# Altium PCB Amplifier.PcbDoc
Units mm, origin at the board's own origin, x right, y up, seen from the top; angles counter-clockwise.
Board outline 40 x 100 mm, 4 copper layers (Top Layer, Gnd, DC Power, Bottom Layer), stack 1.782 mm thick; 67 components, 37 nets, 183 pads, 2 vias.
Unrouted connection lines stored in the file: 106.
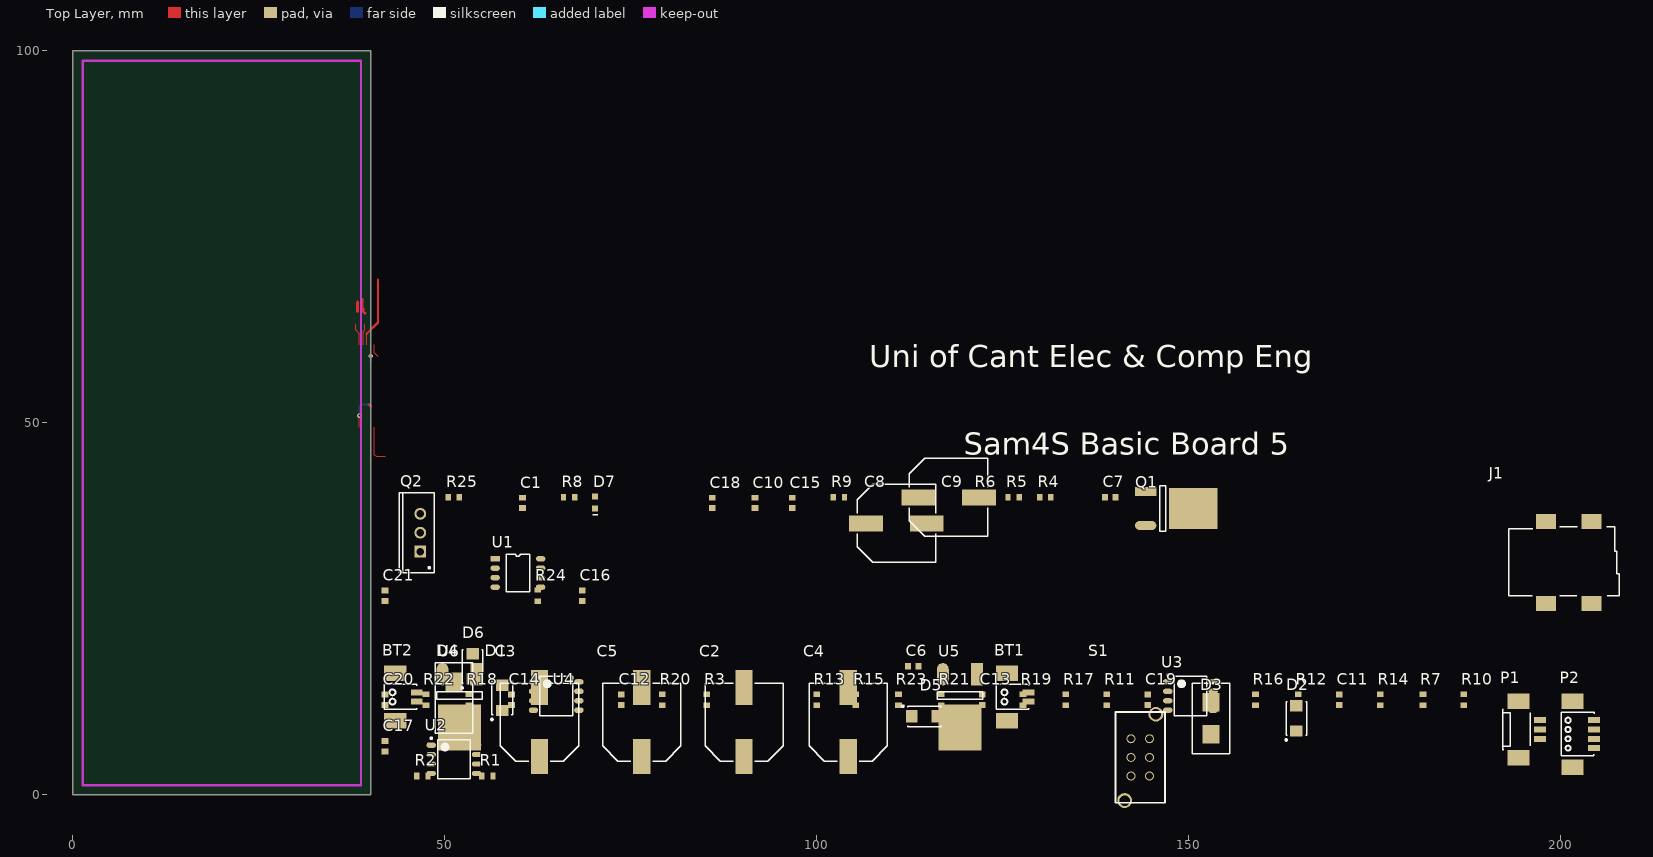
[diagram p0: Top Layer view]
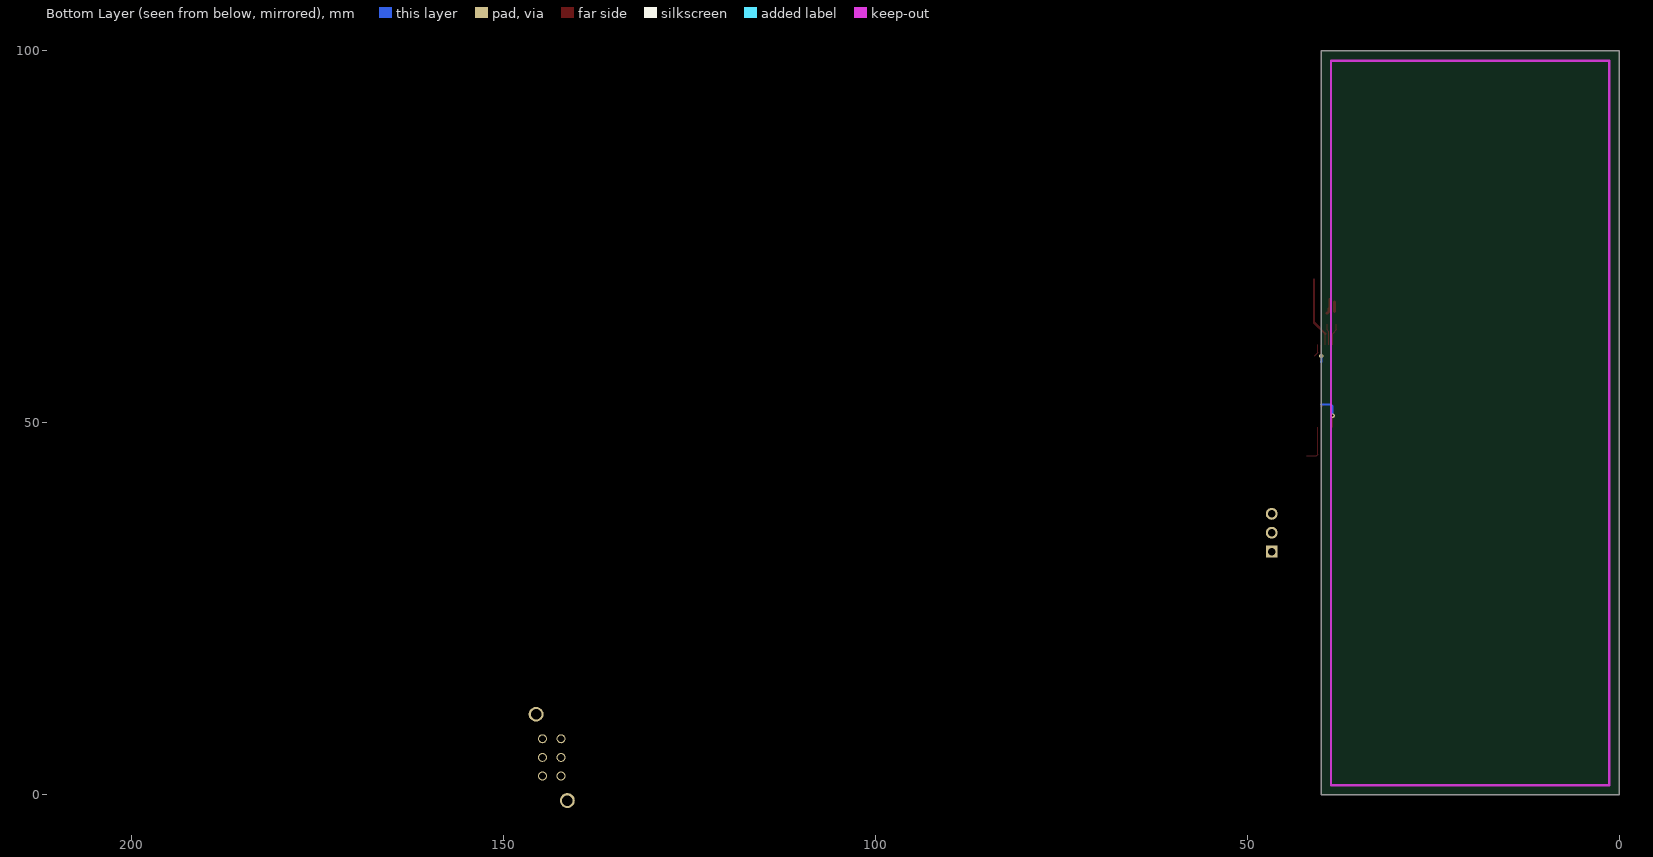
[diagram p1: Bottom Layer view, seen from below]
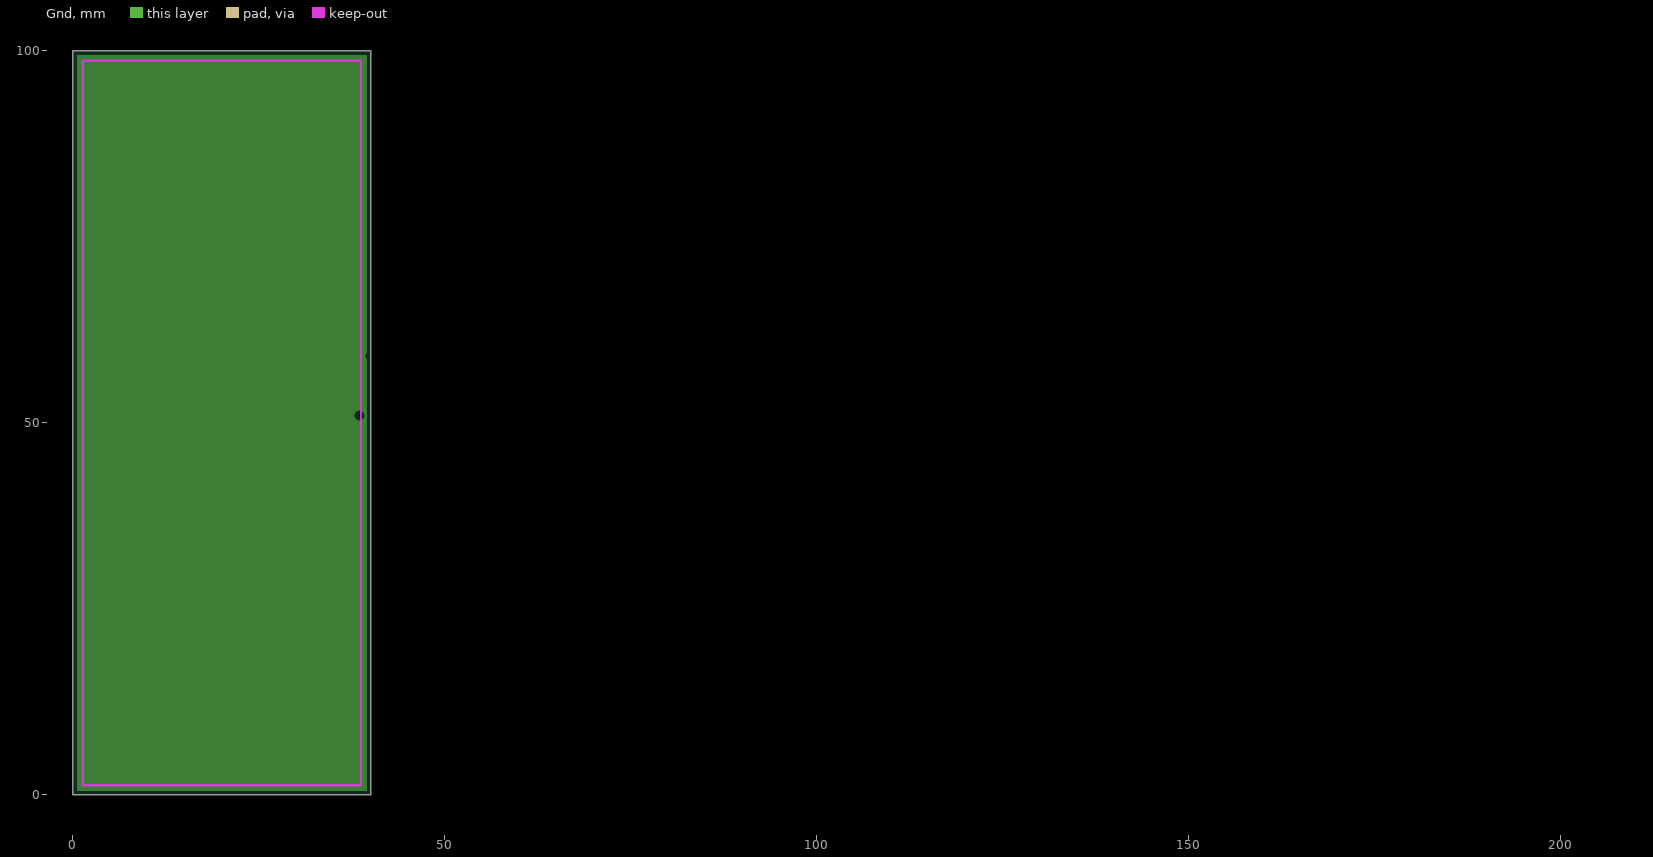
[diagram p2: Gnd, clearances drawn from the general rule]
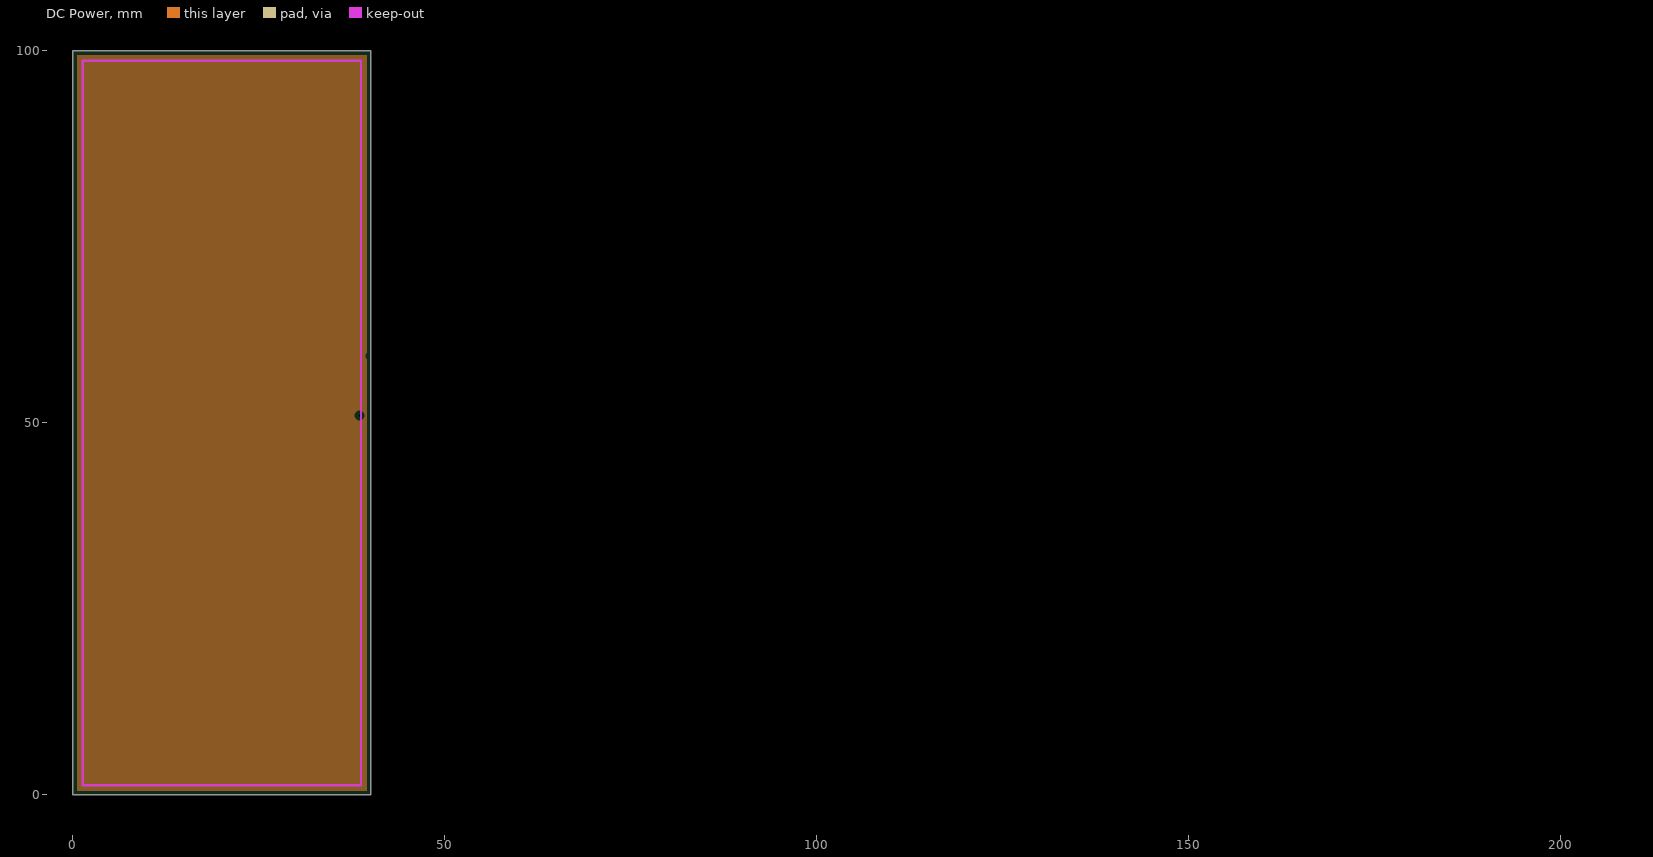
[diagram p3: DC Power, clearances drawn from the general rule]

## Layer stack, top to bottom
Top Solder: solder mask 0.0102, Solder Resist, Dk 3.5
Top Layer: signal copper 0.0356
Dielectric1: prepreg 0.32, FR-4, Dk 4.8
Gnd: plane copper 0.0356
Dielectric2: core 1, FR-4, Dk 4.8
DC Power: plane copper 0.0356
Dielectric3: prepreg 0.32, FR-4, Dk 4.8
Bottom Layer: signal copper 0.0356
Bottom Solder: solder mask 0.0102, Solder Resist, Dk 3.5

## Board outline
0,0 0,100 40,100 40,0

## Design rules (kind name [scope] priority, off if disabled: settings)
Clearance Min_Clearance_Circuit_Labs [All] p1: gap=0.15
FanoutControl Fanout_BGA [IsBGA] p1 off: bgadir=Out bgaviamode=Centered fanoutstyle=Auto fanoutdirection=Alternating viagrid=0.025 // Fanout_BGA (Default Rule)
HoleSize [All] p1: absolutevalues=TRUE maxlimit=10 minlimit=0.3 maxpercent=80.000 minpercent=20.000
MinimumAnnularRing [All] p1: minimumring=0.1
MinimumSolderMaskSliver [All] p1 off: minsoldermaskwidth=0.25
NetAntennae [All] p1: netantennaetolerance=1
PasteMaskExpansion [All] p1 off: expansion=0.2
PlaneClearance [All] p1: clearance=0.508
PlaneConnect [All] p1: planeconnectstyle=Relief reliefexpansion=0.508 reliefentries=4 reliefconductorwidth=0.254 reliefairgap=0.254
PolygonConnect [All] p1: connectstyle=Relief reliefconductorwidth=0.254 reliefentries=4 polygonreliefangle="90 Angle" airgapwidth=0.254
RoomDefinition "Power Management" [InComponentClass('Power Management')] p1: confinementstyle=ConfineIn formatcopy=TRUE lockcomponents=FALSE outline 41.2,25.3 72.45,25.3 72.45,30.8 41.2,30.8
RoomDefinition Main [InComponentClass('Main')] p2: confinementstyle=ConfineIn formatcopy=TRUE lockcomponents=FALSE outline -50.8,-76.2 0,-76.2 0,-50.8 -50.8,-50.8
RoomDefinition "AC Power Supply" [InComponentClass('AC Power Supply')] p3: confinementstyle=ConfineIn formatcopy=TRUE lockcomponents=FALSE outline 40.95,1.55 129.95,1.55 129.95,20.8 40.95,20.8
RoutingVias [All] p1: holewidth=0.5 width=1 viastyle="Through Hole" minholewidth=0.3 minwidth=0.6 maxholewidth=1 maxwidth=2
SMDNeckDown [All] p1 off: percent=50.000
SMDToCorner [All] p1: distance=98425
SMDToPlane [All] p1: distance=1968504
SilkToSolderMaskClearance SilkscreenOverComponentPads [IsPad] p1: minsilkscreentomaskgap=0.254 clearancetoexposedcopper=TRUE
SolderMaskExpansion [All] p1: expansion=0.102
ViasUnderSMD [All] p1: allowed=FALSE
Width [All] p1: maxlimit=2 minlimit=0.15 preferedwidth=0.3
22 further rules are at their usual default settings.

## Classes and differential pairs
component class "AC Power Supply": BT1 BT2 C2 C3 C4 C5 C6 C7 D1 D2 D3 D4 D5 D6 J1 R1 R2 S1 U5 U6
component class "Power Management": C1 C8 C9 C10 C15 C16 C18 C21 D7 Q1 Q2 R4 R5 R6 R8 R9 R24 R25 U U1
component class Main: C11 C12 C13 C14 C19 C20 J2 J3 P1 P2 R3 R7 R10 R11 R12 R13 R14 R15 R16 R17 R18 R19 R20 R21 R22 R23 S2 U1 U3 U4 VR3

## Components (designator, comment, footprint, x,y, rotation, side; value= is the part's Value field where it differs from the comment)
BT1 "SMD Vert 1.25mm" SD-53398-0219 128.45,13.8 r90 top
BT2 "SMD Vert 1.25mm" SD-53398-0219 46.2,13.8 r90 top
C1 "1uF" CAPC1608L 60.43,39.25 r90 top
C2 "470uF/35V" EEE-FK1V471SP 90.2,9.8 r90 top
C3 "470uF/35V" EEE-FK1V471SP 62.7,9.8 r90 top
C4 "470uF/35V" EEE-FK1V471SP 104.2,9.8 r90 top
C5 "470uF/35V" EEE-FK1V471SP 76.45,9.8 r90 top
C6 "220nF" CAPC1608L 112.95,17.3 r0 top
C7 "220nF" CAPC1608L 139.43,40 r0 top
C8 "220uF/25V" UUQ1E221MCL1GS 110.68,36.5 r0 top
C9 "220uF/25V" UUQ1E221MCL1GS 117.68,40 r0 top
C10 "220nF" CAPC1608L 91.68,39.25 r90 top
C11 "220pF" CAPC1608L 170.2,12.8 r90 top
C12 "220pF" CAPC1608L 73.7,12.8 r90 top
C13 "2.2uF" CAPC1608L 122.2,12.8 r90 top
C14 "2.2uF" CAPC1608L 58.95,12.8 r90 top
C15 "220nF" CAPC1608L 96.68,39.25 r90 top
C16 "220nF" CAPC1608L 68.45,26.8 r90 top
C17 "220nF" CAPC1608L 41.95,6.55 r90 top
C18 "220nF" CAPC1608L 85.93,39.25 r90 top
C19 "220pF" CAPC1608L 144.45,12.8 r90 top
C20 "220pF" CAPC1608L 41.95,12.8 r90 top
C21 "220nF" CAPC1608L 41.95,26.8 r90 top
D1 "SS14-E3/5AT" DIOM4227X23N 57.7,13.05 r90 top
D2 "SS14-E3/5AT" DIOM4227X23N 164.45,10.3 r90 top
D3 "S1BB-13-F" S1BB-13-F 152.95,10.3 r90 top
D4 "S1BB-13-F" S1BB-13-F 51.2,13.05 r90 top
D5 "SS14-E3/5AT" DIOM4227X23N 114.45,10.55 r0 top
D6 "SS14-E3/5AT" DIOM4227X23N 53.7,17.3 r90 top
D7 "H-E RED" WL-SMCW0603 70.18,38.5 r90 top
J1 "Power Skt" 1613_14 198,31.25 r0 top
P1 "SMD Horiz 1.25mm" SD-53261-0319 197.2,10.05 r90 top
P2 "SMD Vert 1.25mm" SD-53398-0419 204.449,10.05 r90 top
Q1 "FQD17P06TM" FQU17P06 144.18,38.5 r0 top
Q2 "FQD10N20CTM" TO-220AB 46.68,35.25 r90 top
R1 "220R" RESC1608L 55.7,2.55 r0 top
R2 "220R" RESC1608L 46.95,2.55 r0 top
R3 "0R" RESC1608L 85.2,12.8 r90 top
R4 "270K" RESC1608L 130.68,40 r0 top
R5 "270K" RESC1608L 126.43,40 r0 top
R6 "40.2K" RESC1608L 122.18,40 r0 top
R7 "0R" RESC1608L 181.45,12.8 r90 top
R8 "270K" RESC1608L 66.68,40 r0 top
R9 "33K" RESC1608L 102.93,40 r0 top
R10 "0R" RESC1608L 186.95,12.8 r90 top
R11 "0R" RESC1608L 138.95,12.8 r90 top
R12 "40.2K" RESC1608L 164.7,12.8 r90 top
R13 "40.2K" RESC1608L 99.95,12.8 r90 top
R14 "10K" RESC1608L 175.7,12.8 r90 top
R15 "0R" RESC1608L 105.2,12.8 r90 top
R16 "1K5" RESC1608L 158.95,12.8 r90 top
R17 "0R" RESC1608L 133.45,12.8 r90 top
R18 "0R" RESC1608L 53.2,12.8 r90 top
R19 "0R" RESC1608L 127.7,12.8 r90 top
R20 "10K" RESC1608L 79.2,12.8 r90 top
R21 "0R" RESC1608L 116.7,12.8 r90 top
R22 "1K5" RESC1608L 47.45,12.8 r90 top
R23 "0R" RESC1608L 110.95,12.8 r90 top
R24 "270K" RESC1608L 62.45,26.8 r90 top
R25 "1M5" RESC1608L 51.18,40 r0 top
S1 "PN22SJSA03QE" "PN22SJSA03QE - duplicate" 143.45,5.05 r90 top
U1 "NJM2903M" NJM2903M#1 56.75,31.75 r0 top
U2 "NJM2903M" NJM2903M#2 51.2,4.8 r0 top
U3 "NJM4556AM" NJM2903M#2 150.2,13.3 r0 top
U4 "NJM4556AM" NJM2903M#2 64.95,13.3 r0 top
U5 "MC7812CDTG" MC7812CDTRKG 119.2,9.05 r90 top
U6 "MC7812CDTG" MC7812CDTRKG 51.95,9.05 r90 top

## Footprints (in the part's own frame and the unit in brackets; to place one, negate y for a bottom-side part, rotate by r counter-clockwise, add the part's x,y. Pads: shape width x height; smd on the part's side, far side on the other; paste and mask are expansions set on the pad)
1613_14 [mm] "Connector; Low Power Socket, SM, Right Angle, Body 14.8 x 9 x 11 mm (LxWxH)"
  rect 2.7x2 smd: 1(0,-5.5) 2(6.1,-5.5) 3(6.1,5.5) 4(0,5.5)
  round 1.5 hole 1.8: MH1(0,0) MH2(4.5,0)
  silkscreen extent -5,-4.5 9.8,4.8, body extent -5,-4.5 9.8,4.8, height 11
CAPC1608L [mm] "Chip Capacitor, Body 1.6x0.8mm, IPC High Density"
  rect 0.8x0.9 smd: 1(-0.7,0) 2(0.7,0)
  body extent -0.87,-0.48 0.87,0.48, height 0.85
DIOM4227X23N [mm] "Molded Diode, 2-Leads, Body 4.25x2.67mm, IPC Medium Density"
  rect 1.52x1.68 smd: 1(-1.7,0) 2(1.7,0)
  silkscreen extent -3.02,-1.4 2.25,1.51, body extent -2.25,-1.39 2.25,1.4, height 2.29
EEE-FK1V471SP [mm] "Aluminum Electrolytic Capacitor, Body 10.30x10.30x10.50mm, IPC Low Density"
  rect 4.7x2.3 smd: 1(-4.65,0) 2(4.65,0)
  silkscreen extent -5.25,-5.25 5.25,5.25, body extent -5.25,-5.25 5.25,5.25, height 10.5
FQU17P06 [mm]
  rect 2.85x1.25 smd: 1(0,2.28)
  rect 6.5x5.55 smd: 2(6.4,0)
  oval 2.85x1.25 smd: 3(0,-2.28)
  silkscreen extent 1.91,-3.05 2.67,3.05
MC7812CDTRKG [mm]
  rect 3x1.6 smd: 1(7.18,-2.285)
  rect 6.2x5.8 smd: 2(0,0)
  oval 3x1.6 smd: 3(7.18,2.285)
  silkscreen extent 3.81,-3.05 4.85,3.05
NJM2903M#1 [mm]
  rect 1.27x0.72 smd: 1(0,0)
  oval 1.27x0.72 smd: 2(0,-1.27) 3(0,-2.54) 4(0,-3.81) 5(6.1,-3.81) 6(6.1,-2.54) 7(6.1,-1.27) 8(6.1,0)
  silkscreen extent 1.47,-4.44 4.63,0.64
NJM2903M#2 [mm] "SOIC, 8-Leads, Body 5.00x5.00mm, Pitch 1.27mm, IPC Medium Density"
  oval 1.27x0.72 smd: 1(-3.05,1.905) 2(-3.05,0.635) 3(-3.05,-0.635) 4(-3.05,-1.905) 5(3.05,-1.905) 6(3.05,-0.635) 7(3.05,0.635) 8(3.05,1.905)
  silkscreen extent -3.17,-2.65 2.2,2.94, body extent -2.6,-2.65 2.6,2.65, height 2
"PN22SJSA03QE - duplicate" [mm]
  round 1.2 hole 0.9: 1(-2.5,1.25) 2(0,1.25) 3(2.5,1.25) 4(-2.5,-1.25) 5(0,-1.25) 6(2.5,-1.25)
  round 2 hole 1.4: ""(-5.8,2.1) ""(5.8,-2.1)
  silkscreen extent -6.1,-3.35 6.1,3.35
RESC1608L [mm] "Chip Resistor, Body 1.6x0.8mm, IPC High Density"
  rect 0.7x0.9 smd: 1(-0.75,0) 2(0.75,0)
  body extent -0.85,-0.48 0.85,0.48, height 0.9
S1BB-13-F [mm]
  rect 2.5x2.3 smd: A(-2.15,0) K(2.15,0)
  silkscreen extent -4.75,-2.5 4.75,2.5
SD-53261-0319 [mm] "Molex Pico Blade 3 Pos Horiz SMD Header"
  rect 0.8x1.6 smd: 1(0,0) 2(-1.25,0)
  rect 0.81x1.6 smd: 3(-2.5,0)
  rect 2.1x3 smd: M(-5.05,2.9) M(2.55,2.9)
  silkscreen extent -3.98,1.3 1.5,5.05, body extent -3.88,1.13 1.4,4.94, height 3.45
SD-53398-0219 [mm] "Molex Pico Blade 2 Pos Vert SMD Header"
  rect 0.8x1.6 smd: 1(0,0) 2(-1.25,0)
  rect 2.1x3 smd: M(-3.8,2.9) M(2.55,2.9)
  silkscreen extent -2.3,0 1.05,4.35, body extent -2.48,0.1 1.28,4.24, height 4.75
SD-53398-0419 [mm] "Molex Pico Blade 4 Pos Vert SMD Header"
  rect 0.8x1.6 smd: 1(0,0) 2(-1.25,0)
  rect 0.81x1.6 smd: 3(-2.5,0) 4(-3.75,0)
  rect 2.1x3 smd: M(-6.3,2.9) M(2.55,2.9)
  silkscreen extent -4.8,-0.01 1.05,4.4, body extent -5.13,0.05 1.39,4.3, height 4.75
TO-220AB [mm] "TO, Thru-Hole, Vertical, Heatsink Mounted; 3 In-Line Leads; Pitch 2.54 mm"
  rect 1.6x1.6 hole 1: 1(-2.54,0)
  round 1.6 hole 1: 2(0,0) 3(2.54,0)
  silkscreen extent -5.35,-1.85 5.35,2.85, body extent -5.4,-1.9 5.4,2.9, height 19.3
UUQ1E221MCL1GS [mm] "Aluminum Electrolytic Capacitor, Body 10.30x10.30x10.80mm, IPC Medium Density"
  rect 4.55x2.15 smd: 1(-4.075,0) 2(4.075,0)
  silkscreen extent -5.25,-5.25 5.25,5.25, body extent -5.25,-5.25 5.25,5.25, height 10.8
WL-SMCW0603 [mm] "2.4 x 0.8 x 0.7mm LED"
  rect 0.8x0.8 smd: 1(0,0) 2(1.6,0)
  silkscreen extent -0.85,-0.35 -0.85,0.35

## Part data
BT1 BT2: library part JB_53398-02, "Header_Vert_2Pos_1.25mm_125V@1A_SMT"
C1: library part CC_1uF_0603, "CAP CER 1uF Y5V -20% +80% 16V 0603"
C2 C3 C4 C5: library part CA_470uF_16V, "CAP ALUM 470uF 35V SMD"
C6 C7 C10 C15 C16 C17 C18 C21: library part CC_220nF_0603, "CAP CER 220nF Y5V -20% +80% 25V 0603"
C8 C9: library part CA_100uF_16V, "220µF 25V Aluminum Capacitors Radial, Can - SMD 1000 Hrs @ 105°C"
C11 C12 C19 C20: library part CC_220pF_0603, "CAP CER 220pF NPO/COG +-5% 50V 0603"
C13 C14: library part CC_2.2uF_0603, "CAP CER 2.2uF X5R +-20% 10V 0603"
D1 D2 D5 D6: library part DS_SS14E3, "DIODE, SCHOTTKY, 1A, 40V, DO-214AC"
D3 D4: library part DR_BAS16TT1G, "Diode Switching, Vr 75V, 200mA, SOT-416"
D7: library part DL_150060BS75000, "LED Blue 270mcd 0603 SMD"
J1: library part "JP_1613 14", "Power supply chassis socket, SMD, Right Angle, with break contacts, 24V DC, 3.5A"
P1: library part JB_53261-03, "Header_Horiz_3Pos_1.25mm_125V@1A_SMT"
P2: library part JB_53398-04, "Header_Vert_4Pos_1.25mm_125V@1A_SMT"
Q1: library part TM_SSM3J328R, "P-Channel 60V 12A (Tc) 2.5W (Ta), 44W (Tc) Surface Mount D-Pak"
Q2: library part NMOS-2, "N-Channel Power MOSFET"
R1 R2: library part RS_220R, "RES 220 OHM 1/10W 5% 0603 SMD"
R3 R7 R10 R11 R15 R17 R18 R19 R21 R23: library part RS_0R0, "RES 0.0 OHM 1/10W 5% 0603 SMD"
R4 R5 R8 R24: library part RS_270K, "RES 270K OHM 1/10W 5% 0603 SMD"
R6: library part RS_43K, "RES 43K OHM 1/10W 5% 0603 SMD"
R9: library part RS_33K, "RES 33.0K OHM 1/10W 5% 0603 SMD"
R12 R13: library part RS_39K, "RES 39K OHM 1/10W 5% 0603 SMD"
R14 R20: library part RS_10K, "RES 10.0K OHM 1/10W 5% 0603 SMD"
R16 R22: library part RS_1K5, "RES 1.5K OHM 1/10W 5% 0603 SMD"
R25: library part RS_1M5, "RES 1.5M OHM 1/10W 5% 0603 SMD"
U1 U2 U3 U4: library part NJM2903D
U5 U6: library part SV_TLV70233DBVR, "IC REG LDO 3.3V 0.3A SOT23-5"

## Via types
v1: diameter 0.6, hole 0.3, Top Layer to Bottom Layer, 2 vias

## Nets (pads, with @x,y where several pads share a name; then routed paths per layer and width w, separated by ;. In a path a pad name is that pad's centre, name@x,y a point inside that pad or via, vN(x,y) a via of type N, cw(c..) or ccw(c..) an arc to the next point about the centre after c; other vN are vias at no path point)
GND: BT1.2 BT2.2 C2.1 C3.2 C4.1 C5.2 C6.1 C7.2 C8.1 C9.1 C11.1 C12.1 C18.2 J1.1 P1.2 P2.1 P2.2 R12.1 R13.1 R14.1 R20.1 U5.2 U6.2
NetBT1_1: BT1.1 D2.2 R1.2
NetBT2_1: BT2.1 D6.1 R2.2
NetC1_1: C1.1 R5.1 R9.2 R25.1 U2.2
NetC2_2: C2.2 C4.2 U5.1
NetC3_1: C3.1 C5.1 U6.1
NetC6_2: C6.2 D1.2 U5.3
NetC7_1: C7.1 D5.1 U6.3
NetC11_2: C11.2 R7.2 R14.2
NetC12_2: C12.2 R3.2 R20.2 U1.3
NetC13_1: C13.1
NetC13_2: C13.2 R12.2 U3.3 U3.5
NetC14_1: C14.1
NetC14_2: C14.2 R13.2 U4.3 U4.5
NetC16_1: C16.1 Q1.1 R24.2
NetC19_1: C19.1 R16.1 R17.2 R19.2
NetC19_2: C19.2 R16.2
NetC20_1: C20.1 R21.2 R22.1 R23.2 U1.2
NetC20_2: C20.2 R22.2 U1.1
NetC21_2: C21.2 Q2.1 R8.2 R25.2 U1.7
NetD1_1: D1.1 D2.1 R1.1
NetD3_1: J1.3 J1.4
NetD5_2: D5.2 D6.2 R2.1
NetD7_2: D7.2 R6.1 U1.5 U2.3
NetP1_1: P1.1 R7.1
NetP1_3: P1.3 R3.1
NetP2_3: P2.3 R15.2 R18.2
NetP2_4: P2.4 R10.2 R11.2
NetR4_1: R4.1 R24.1 U1.6 U2.1
NetR10_1: R10.1 U3.6 U3.7
NetR11_1: R11.1 U3.1 U3.2
NetR15_1: R15.1 U4.6 U4.7
NetR18_1: R18.1 U4.1 U4.2
PW1: C1.2 C15.1 D7.1 R9.1
PW2: C15.2 C16.2 C21.1 Q1.3 Q2.3 R4.2 R5.2 R6.2 R8.1
V+: C8.2 C9.2 C10.2 Q1.2
V-: C10.1 C18.1 Q2.2
pads on no net: BT1.M BT2.M C17.1 C17.2 D3.A D3.K D4.A D4.K J1.2 J1.MH1 J1.MH2 P1.M P2.M R17.1 R19.1 R21.1 R23.1 S1. S1.1 S1.2 S1.3 S1.4 S1.5 S1.6 U1.4 U1.8 U2.4 U2.5 U2.6 U2.7 U2.8 U3.4 U3.8 U4.4 U4.8
copper on no net: | length 32.3
  Top Layer w0.15: 38,63.25 38,62.5 38.5,62 38.5,60.5 ; 38.5,49.45 v1(38.5,51) ; 39,60.5 39,62.25 39.25,62.5 39.25,63.25 ; 39.5,60.5 39.5,62 ; v1(40,59) 40,60.5 ; 40.5,49.45 40.5,45.75 40.75,45.5 42,45.5 ; 40.5,60.5 40.5,59.465 40.965,59
  Top Layer w0.3: 39.5,62 41,63.5 41,69.25 ; 39.75,52.5 40.025,52.225
  Top Layer w0.381: 38.25,65 38.25,65.35 ; 38.25,65.5 38.25,66.25 ; 38.885,65.5 38.885,66.615 ; 39,65.35 39,65 39.25,64.75
  Bottom Layer w0.254: v1(38.5,51) 38.5,52.25 38.75,52.5 40.05,52.5
  Bottom Layer w0.3: v1(40,59) 40,58.25 40.05,58.2

## Polygon pours and split planes (outlines as drawn)
no net on Gnd (split plane): 39.49,0.51 0.51,0.51 0.51,99.49 39.49,99.49
no net on DC Power (split plane): 39.49,0.51 0.51,0.51 0.51,99.49 39.49,99.49

## Keep-outs
Keep-Out Layer:
  lines w0.3: 1.3,1.3 38.7,1.3 38.7,98.7 1.3,98.7 1.3,1.3

## Silkscreen, mask and mechanical layers (free items; w line width, h text height)
Top Overlay:
  text "Uni of Cant Elec & Comp Eng" at 107,57.5 h3
  text "Sam4S Basic Board 5" at 119.75,45.75 h3
Dimension:
  lines w0.254: -5.508,1.524 -5,0 ; -5.508,98.476 -5,100 ; -5.254,0 -4.746,0 ; -5.254,100 -4.746,100 ; -5,44.261 -5,0 ; -5,55.739 -5,100 ; -4.492,1.524 -5,0 ; -4.492,98.476 -5,100 ; 0,-5.254 0,-4.746 ; 1.524,-5.508 0,-5 ; 1.524,-4.492 0,-5 ; 14.896,-5 0,-5 ; 25.104,-5 40,-5 ; 38.476,-5.508 40,-5 ; 38.476,-4.492 40,-5 ; 40,-5.254 40,-4.746
  text "100 (mm)" at -4.086,44.515 h1.52 r90
  text "40 (mm)" at 15.15,-5.914 h1.52
PCB Boundary:
  the board outline again, w0.3
Drill Drawing:
  text ".LEGEND" at 90.08,5.08 h1.52
  text "Drill Drawing." at 90.08,2.54 h1.52